# Altium PCB UD3c bootstrap output.PcbDoc
Units mm, origin at the board's own origin, x right, y up, seen from the top; angles counter-clockwise.
Board outline 41.73 x 30.78 mm, 2 copper layers (Top Layer, Bottom Layer); 25 components, 18 nets, 78 pads, 5 vias.
Unrouted connection lines stored in the file: 1.
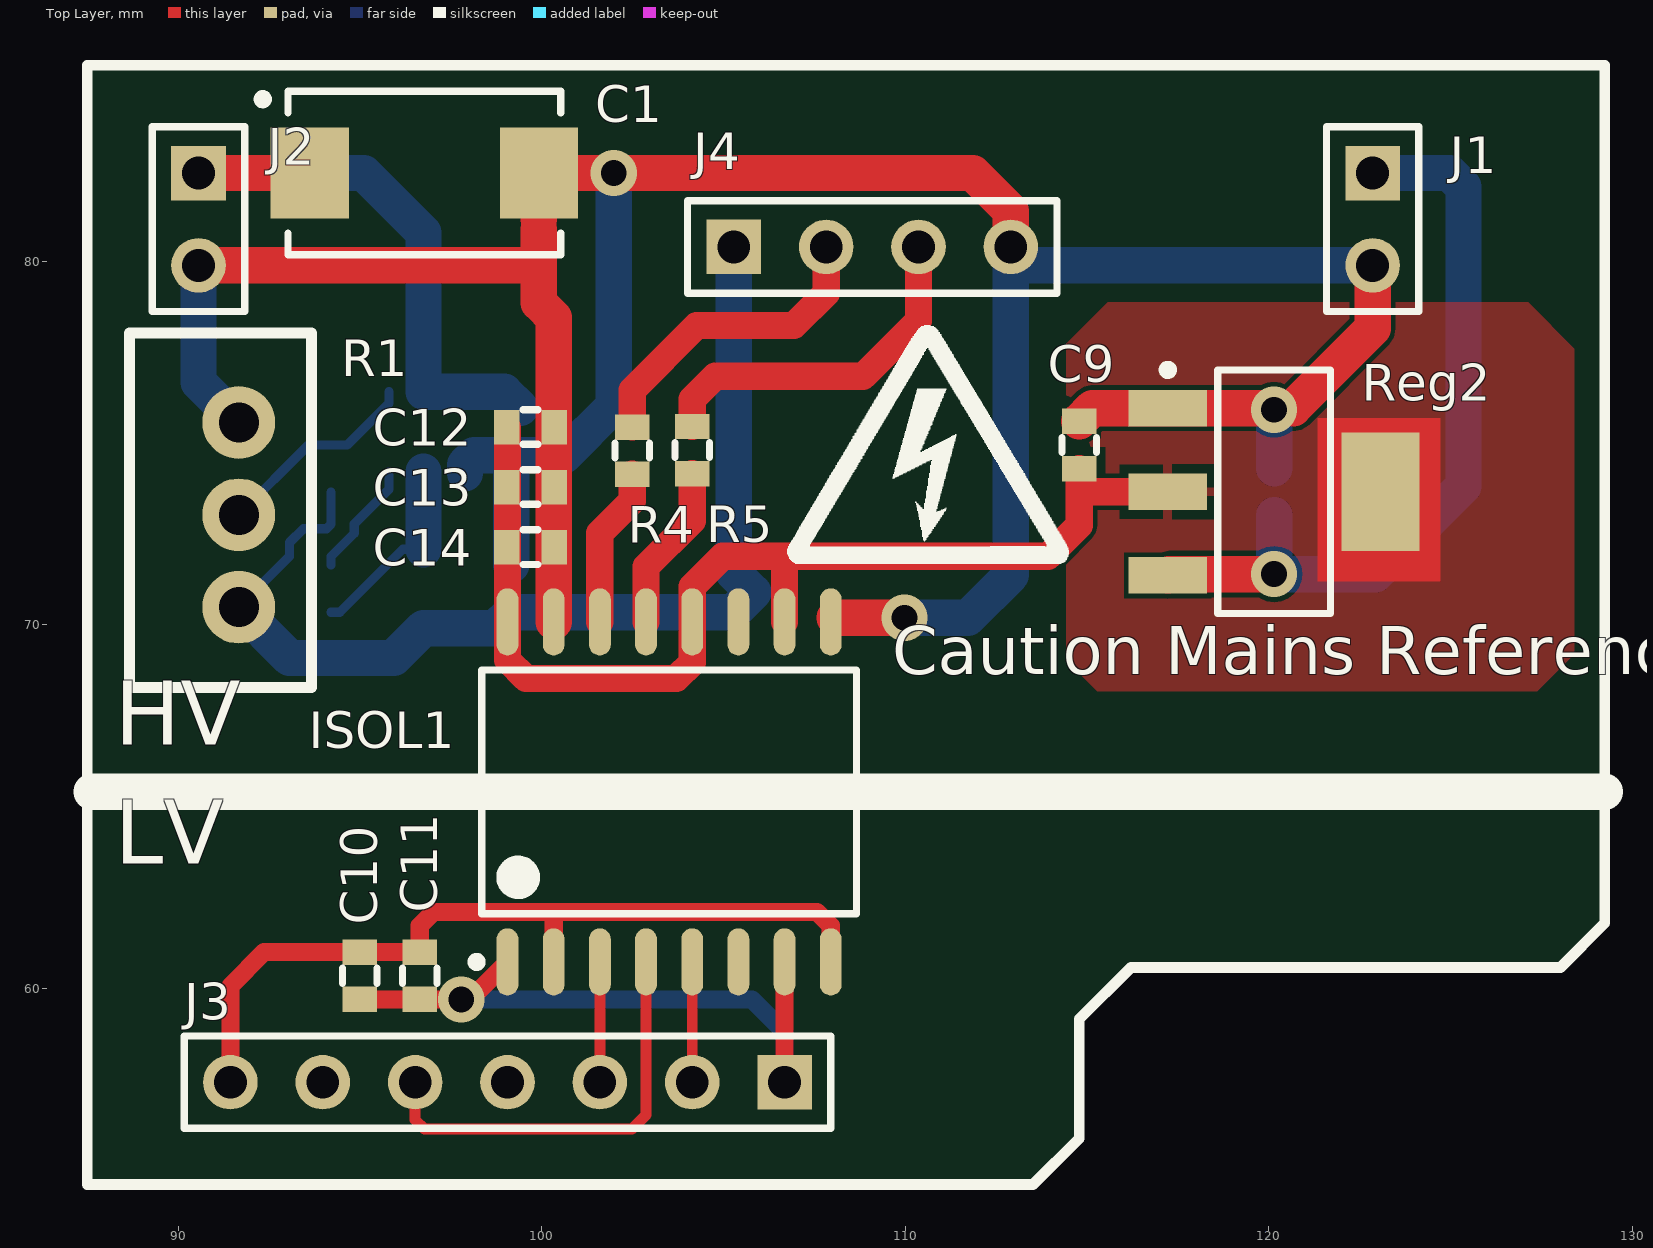
[diagram p0: Top Layer view]
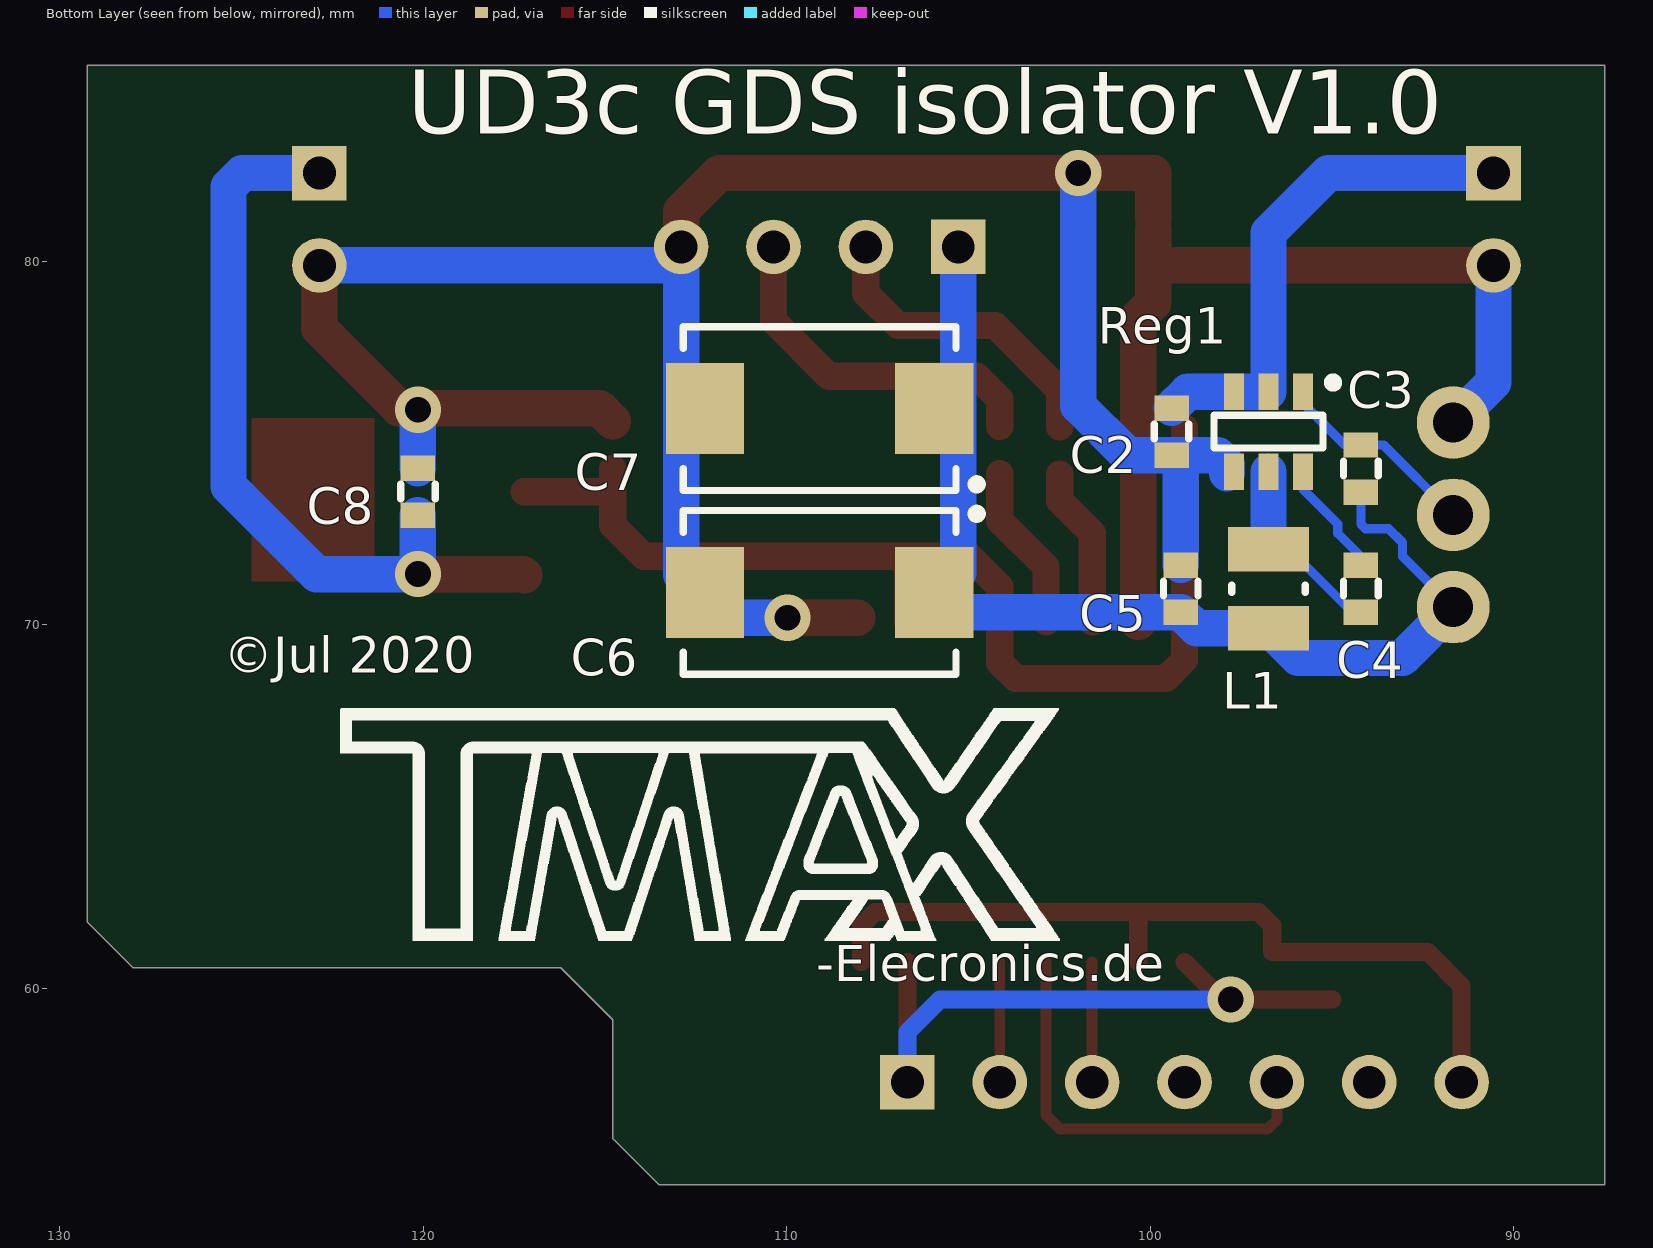
[diagram p1: Bottom Layer view, seen from below]
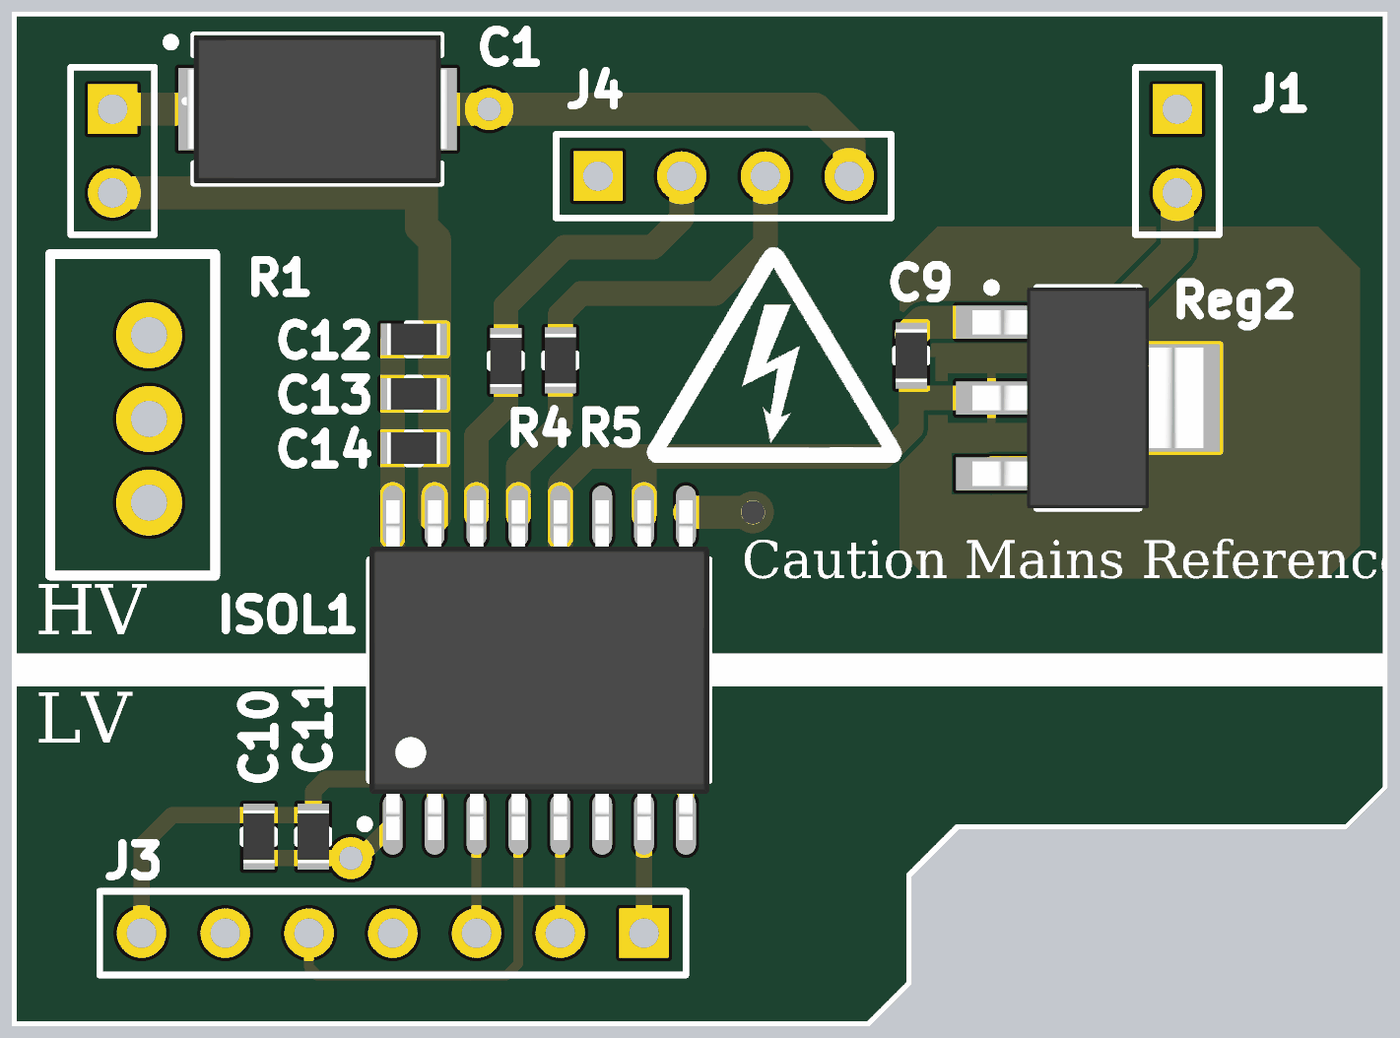
[diagram p2: 3D render of the assembled board from above, using the file's embedded part models]
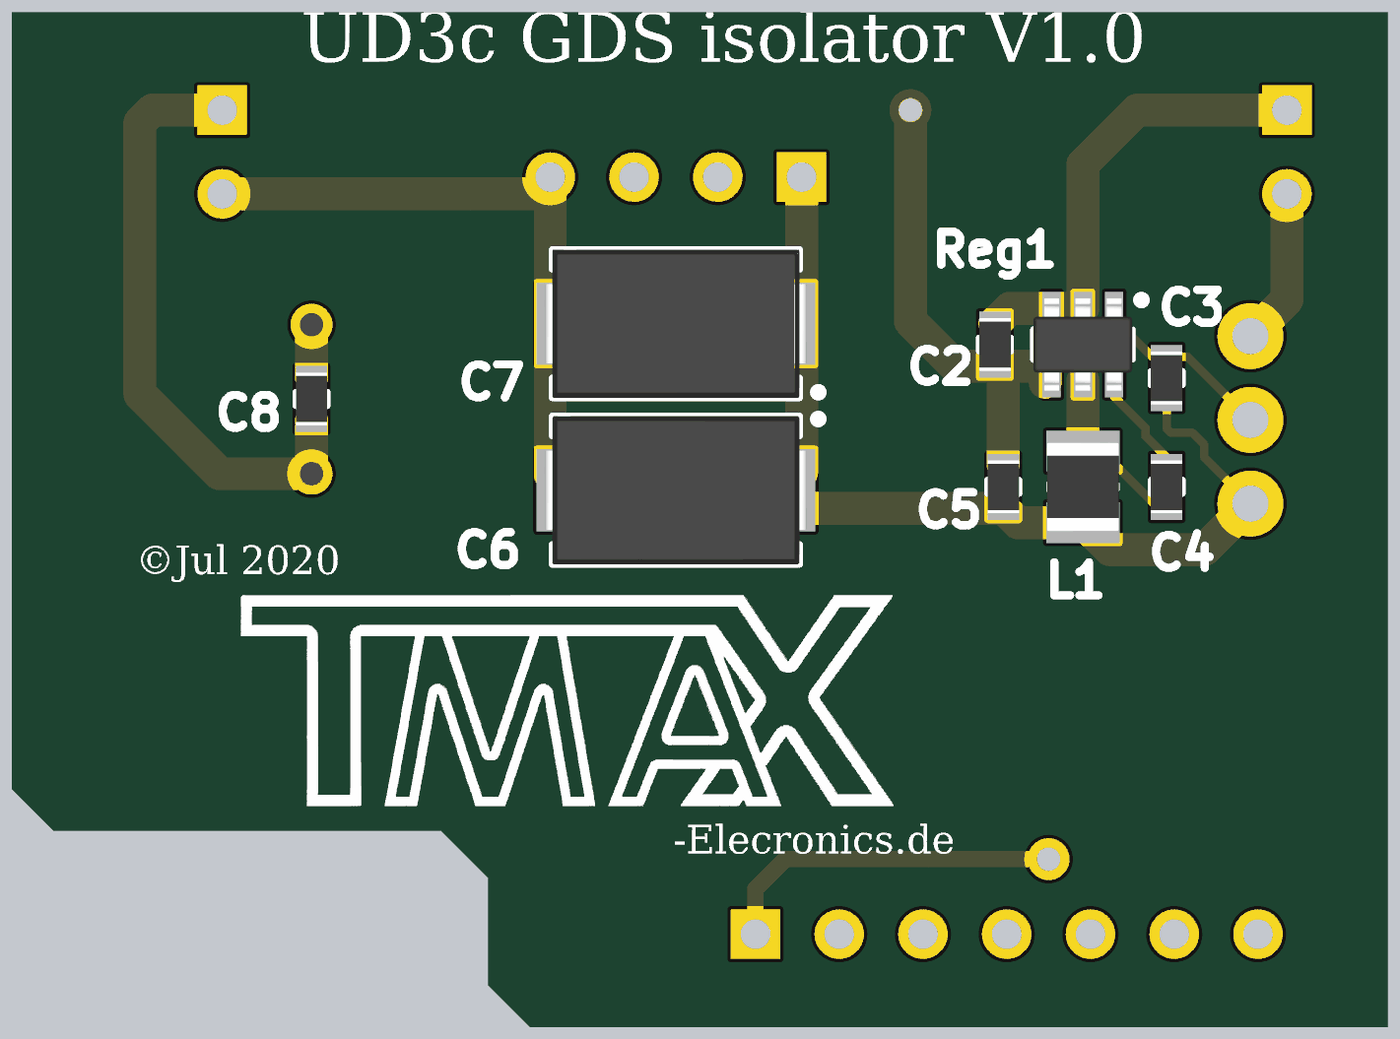
[diagram p3: 3D render of the assembled board from below, using the file's embedded part models]

## Layer stack, top to bottom
Top Solder: solder mask 0.0102, Solder Resist, Dk 3.5
Top Layer: signal copper 0.0356
Dielectric 1: dielectric 0.32, FR-4, Dk 4.8
Bottom Layer: signal copper 0.0356
Bottom Solder: solder mask 0.0102, Solder Resist, Dk 3.5

## Board outline
87.503,54.604 87.503,85.388 129.235,85.388 129.235,61.825 127.978,60.568 116.212,60.568 114.783,59.139 114.783,55.872 113.514,54.604

## Design rules (kind name [scope] priority, off if disabled: settings)
Clearance [All] p1: gap=0.127 ignorepadtopadclearanceinfootprint=FALSE except(0: Arc-Hole Track-Hole SMDPad-Hole THPad-Hole Via-Hole Fill-Hole Poly-Hole Region-Hole Text-Hole; 0.254: Arc-Text Track-Text SMDPad-Text THPad-Text Via-Text Fill-Text Poly-Text Region-Text Text-Text)
PolygonConnect [All] p1: connectstyle=Relief reliefconductorwidth=0.254 reliefentries=4 polygonreliefangle="90 Angle" airgapwidth=0.254
RoutingVias [All] p1: holewidth=0.711 width=1.27 viastyle="Through Hole" minholewidth=0.711 minwidth=1.27 maxholewidth=0.711 maxwidth=1.27
SolderMaskExpansion [All] p1: expansion=0.102
Width [All] p1: maxlimit=10 minlimit=0.127 preferedwidth=0.3 minimp=50.000000 maximp=50.000000 favimp=50.000000
30 further rules are at their usual default settings.

## Components (designator, comment, footprint, x,y, rotation, side; value= is the part's Value field where it differs from the comment)
C1 "22uF 25V" "2917 Tantalum" 96.774,82.423 r0 top
C2 "100nF" 0603 99.417,75.311 r90 bottom
C3 "100p" 0603 94.21,74.295 r270 bottom
C4 "100n" 0603 94.21,70.993 r270 bottom
C5 "100n" 0603 99.163,70.993 r90 bottom
C6 "22uF 25V" "2917 Tantalum" 109.093,70.893 r0 bottom
C7 "22uF 25V" "2917 Tantalum" 109.093,75.946 r0 bottom
C8 "100nF" 0603 120.142,73.66 r270 bottom
C9 "100nF" 0603 114.783,74.945 r270 top
C10 "10uF" 0603 94.996,60.349 r90 top
C11 "100n" 0603 96.647,60.349 r90 top
C12 "10uF" 0603 99.695,75.438 r180 top
C13 "1uF" 0603 99.695,73.787 r180 top
C14 "100nF" 0603 99.695,72.136 r180 top
ISOL1 "SI8423AB" "SOIC16 WIDE Isol" 103.505,65.405 r90 top
J1 "Gate Drive Power" HDR1X2 122.851,82.423 r270 top
J2 "Gate Drive Power" HDR1X2 90.563,82.423 r270 top
J3 "GD signal" HDR1X7 106.68,57.423 r180 top
J4 "Header 4" HDR1X4 105.283,80.391 r0 top (schematic designator P?)
L1 "10uH SW" 1008 96.75,70.993 r270 bottom
R1 "100k" "Trimmer vert" 91.67,73.025 r270 top
R4 "220" 0603 102.489,74.788 r270 top
R5 "220" 0603 104.14,74.803 r270 top
Reg1 "Buck regulator" TSOT26 96.75,75.311 r270 bottom
Reg2 "5V" SOT223 120.142,73.66 r0 top

## Footprints (in the part's own frame and the unit in brackets; to place one, negate y for a bottom-side part, rotate by r counter-clockwise, add the part's x,y. Pads: shape width x height; smd on the part's side, far side on the other; paste and mask are expansions set on the pad)
0603 [mm] "Chip Resistor, 2-Leads, Body 1.55x0.85mm, IPC Medium Density"
  rect 0.7x0.95 smd: 1(-0.65,0) 2(0.65,0)
  silkscreen extent -0.2,-0.48 0.2,0.48, body extent -0.8,-0.48 0.8,0.48, height 0.55
1008 [mm] "Chip Inductor, 2-Leads, Body 2,50x2,00mm, IPC Medium Density"
  rect 1.23x2.22 smd: 1(-1.085,0) 2(1.085,0)
  silkscreen extent -0.1,-1.01 0.1,1.01, body extent -1.35,-1.1 1.35,1.1, height 1.2
"2917 Tantalum" [mm] "Molded Capacitor, 2-Leads, Body 7.30x4.30mm, IPC Medium Density"
  rect 2.15x2.5 smd: 1(-3.15,0) 2(3.15,0)
  silkscreen extent -4.57,-2.25 3.75,2.25, body extent -3.97,-2.25 3.97,2.25, height 3.1
HDR1X2 [mm] "Connector; Header; 2 Position"
  rect 1.5x1.5 hole 0.9: 1(0,0)
  round 1.5 hole 0.9: 2(2.54,0)
  silkscreen extent -1.27,-1.27 3.81,1.27
HDR1X4 [mm] "Connector; Header; 4 Position"
  rect 1.5x1.5 hole 0.9: 1(0,0)
  round 1.5 hole 0.9: 2(2.54,0) 3(5.08,0) 4(7.62,0)
  silkscreen extent -1.27,-1.27 8.89,1.27
HDR1X7 [mm] "Connector; Header; 7 Position"
  rect 1.5x1.5 hole 0.9: 1(0,0)
  round 1.5 hole 0.9: 2(2.54,0) 3(5.08,0) 4(7.62,0) 5(10.16,0) 6(12.7,0) 7(15.24,0)
  silkscreen extent -1.27,-1.27 16.51,1.27
"SOIC16 WIDE Isol" [mm] "SOIC, 16-Leads, Body 10,30x7,50mm, Pitch 1,27mm, IPC Medium Density"
  oval 1.85x0.6 smd: 1(-4.675,4.445) 2(-4.675,3.175) 3(-4.675,1.905) 4(-4.675,0.635) 5(-4.675,-0.635) 6(-4.675,-1.905) 7(-4.675,-3.175) 8(-4.675,-4.445) 9(4.675,-4.445) 10(4.675,-3.175) 11(4.675,-1.905) 12(4.675,-0.635) 13(4.675,0.635) 14(4.675,1.905) 15(4.675,3.175) 16(4.675,4.445)
  silkscreen extent -4.8,-5.15 3.35,5.42, body extent -5.15,-5.15 5.15,5.15, height 2.65
SOT223 [mm] "SOT223, 4-Leads, Body 6.50x7.00mm (avg), Pitch 2.30mm, IPC Medium Density"
  rect 2.15x1 smd: 1(-2.925,2.3) 2(-2.925,0) 3(-2.925,-2.3)
  rect 2.15x3.25 smd: 2(2.925,0)
  silkscreen extent -3.05,-3.35 1.55,3.47, body extent -3.5,-3.35 3.5,3.35, height 1.8
"Trimmer vert" [mm]
  round 2 hole 1.1: 1(-2.54,0) 2(2.54,0) 3(0,0)
  silkscreen extent -5,-3 4.75,2, body extent -4.86,-3 4.74,2, height 11.6
TSOT26 [mm] "SOT23, 6-Leads, Body 2.90x2.80mm, Pitch 0.95mm, IPC Medium Density"
  rect 1x0.55 smd: 1(-1.099,0.95) 2(-1.099,0) 3(-1.099,-0.95) 4(1.099,-0.95) 5(1.099,0) 6(1.099,0.95)
  silkscreen extent -1.47,-1.5 0.45,1.9, body extent -1.4,-1.5 1.4,1.5, height 1

## Part data
C1 C6 C7: library part "Cap Polar", Supplier Part Number 1=478-9181-1-ND, Supplier 1=Digi-Key, Supplier 2=Digi-Key, Supplier 3=Digi-Key, Supplier 4=Digi-Key, Supplier 5=Digi-Key, Supplier 6=Digi-Key, Supplier Part Number 2=478-9173-1-ND, Supplier Part Number 3=493-11037-ND, Supplier Part Number 4=PCE3462CT-ND, Supplier Part Number 5=399-18864-1-ND, Supplier Part Number 6=399-10512-1-ND
C2 C8 C9 C12 C13 C14: library part Cap, Supplier Part Number 1=1276-2044-1-ND, Supplier Part Number 10=1276-CL10B104KB8NNNLCT-ND, Supplier Part Number 11=399-1085-1-ND, Supplier Part Number 12=1276-1021-1-ND, Supplier Part Number 13=587-2985-1-ND, Supplier 1=Digi-Key, Supplier 2=Digi-Key, Supplier 3=Digi-Key, Supplier 4=Digi-Key, Supplier 5=Digi-Key, Supplier 6=Digi-Key, Supplier 7=Digi-Key, Supplier 8=Digi-Key, Supplier 9=Digi-Key, Supplier 10=Digi-Key, Supplier 11=Digi-Key, Supplier 12=Digi-Key, Supplier 13=Digi-Key, Supplier Part Number 2=1276-1018-1-ND, Supplier Part Number 3=1276-1182-1-ND, Supplier Part Number 4=1276-1009-1-ND, Supplier Part Number 5=1276-1098-1-ND, Supplier Part Number 6=1276-1119-1-ND, Supplier Part Number 7=490-12737-1-ND, Supplier Part Number 8=1276-1183-1-ND, Supplier Part Number 9=587-1249-1-ND
C3 C4 C5 C10 C11: library part Cap, Supplier Part Number 1=1276-2044-1-ND, Supplier Part Number 10=1276-CL10B104KB8NNNLCT-ND, Supplier Part Number 11=399-1085-1-ND, Supplier Part Number 12=1276-1021-1-ND, Supplier Part Number 13=587-2985-1-ND, Supplier Part Number 14=490-14603-1-ND, Supplier Part Number 15=311-3700-1-ND, Supplier Part Number 16=311-1042-1-ND, Supplier Part Number 17=311-1415-1-ND, Supplier Part Number 18=1276-1907-1-ND, Supplier Part Number 19=587-4321-1-ND, Supplier 1=Digi-Key, Supplier 2=Digi-Key, Supplier 3=Digi-Key, Supplier 4=Digi-Key, Supplier 5=Digi-Key, Supplier 6=Digi-Key, Supplier 7=Digi-Key, Supplier 8=Digi-Key, Supplier 9=Digi-Key, Supplier 10=Digi-Key, Supplier 11=Digi-Key, Supplier 12=Digi-Key, Supplier 13=Digi-Key, Supplier 14=Digi-Key, Supplier 15=Digi-Key, Supplier 16=Digi-Key, Supplier 17=Digi-Key, Supplier 18=Digi-Key, Supplier 19=Digi-Key, Supplier 20=Digi-Key, Supplier 21=Digi-Key, Supplier 22=Digi-Key, Supplier Part Number 2=1276-1018-1-ND, Supplier Part Number 3=1276-1182-1-ND, Supplier Part Number 4=1276-1009-1-ND, Supplier Part Number 5=1276-1098-1-ND, Supplier Part Number 6=1276-1119-1-ND, Supplier Part Number 7=490-12737-1-ND, Supplier Part Number 8=1276-1183-1-ND, Supplier Part Number 9=587-1249-1-ND, Supplier Part Number 20=1276-6767-1-ND, Supplier Part Number 21=1276-7060-1-ND, Supplier Part Number 22=311-1084-1-ND
ISOL1: "Three (2/1) channel isolator", Supplier Part Number 1=SI8631AB-B-IS1-ND, Supplier 1=Digi-Key
J1 J2: library part "Header 2", "Header, 2-Pin", LatestRevisionDate=17-Jul-2002, LatestRevisionNote="Re-released for DXP Platform.", Publisher="Altium Limited"
J3: library part "Header 7", "Header, 7-Pin", LatestRevisionDate=17-Jul-2002, LatestRevisionNote="Re-released for DXP Platform.", Publisher="Altium Limited"
J4: "Header, 4-Pin", LatestRevisionDate=17-Jul-2002, LatestRevisionNote="Re-released for DXP Platform.", Publisher="Altium Limited"
L1: library part Inductor, Supplier Part Number 1=541-1250-1-ND, Supplier Part Number 10=SRP1770TA-5R6MCT-ND, Supplier Part Number 11=SRN6028-100MCT-ND, Supplier 1=Digi-Key, Supplier 2=Digi-Key, Supplier 3=Digi-Key, Supplier 4=Digi-Key, Supplier 5=Digi-Key, Supplier 6=Digi-Key, Supplier 7=Digi-Key, Supplier 8=Digi-Key, Supplier 9=Digi-Key, Supplier 10=Digi-Key, Supplier 11=Digi-Key, Supplier Part Number 2=541-1253-1-ND, Supplier Part Number 3=SRN6028-3R9MCT-ND, Supplier Part Number 4=SRN6028-4R7MCT-ND, Supplier Part Number 5=490-10563-1-ND, Supplier Part Number 6=1276-6932-1-ND, Supplier Part Number 7=587-2042-1-ND, Supplier Part Number 8=535-12790-1-ND, Supplier Part Number 9=SRP1265A-1R0MCT-ND
R1: library part Trimmer
R4 R5: library part Resistor, Supplier Part Number 1=RHM10DCT-ND, Supplier Part Number 10=311-200JRCT-ND, Supplier Part Number 11=311-300JRCT-ND, Supplier Part Number 12=YAG3356CT-ND, Supplier Part Number 13=311-220GRCT-ND, Supplier Part Number 14=311-220KGRCT-ND, Supplier Part Number 15=311-1.0KGRCT-ND, Supplier Part Number 16=311-200KHRCT-ND, Supplier Part Number 17=A102451-ND, Supplier Part Number 18=311-2.00KHRCT-ND, Supplier Part Number 19=311-10KGRCT-ND, Supplier 1=Digi-Key, Supplier 2=Digi-Key, Supplier 3=Digi-Key, Supplier 4=Digi-Key, Supplier 5=Digi-Key, Supplier 6=Digi-Key, Supplier 7=Digi-Key, Supplier 8=Digi-Key, Supplier 9=Digi-Key, Supplier 10=Digi-Key, Supplier 11=Digi-Key, Supplier 12=Digi-Key, Supplier 13=Digi-Key, Supplier 14=Digi-Key, Supplier 15=Digi-Key, Supplier 16=Digi-Key, Supplier 17=Digi-Key, Supplier 18=Digi-Key, Supplier 19=Digi-Key, Supplier 20=Digi-Key, Supplier 21=Digi-Key, Supplier 22=Digi-Key, Supplier 23=Digi-Key, Supplier 24=Digi-Key, Supplier 25=Digi-Key, Supplier 26=Digi-Key, Supplier 27=Digi-Key, Supplier 28=Digi-Key, Supplier 29=Digi-Key, Supplier 30=Digi-Key, Supplier 31=Digi-Key, Supplier 32=Digi-Key, Supplier 33=Digi-Key, Supplier 34=Digi-Key, Supplier 35=Digi-Key, Supplier 36=Digi-Key, Supplier 37=Digi-Key, Supplier 38=Digi-Key, Supplier 39=Digi-Key, Supplier 40=Digi-Key, Supplier 41=Digi-Key, Supplier 42=Arrow, Supplier Part Number 2=696-1834-1-ND, Supplier Part Number 3=RMCF0603JT3K90CT-ND, Supplier Part Number 4=RHM1.0KDCT-ND, Supplier Part Number 5=RHM100DCT-ND, Supplier Part Number 6=RMCF0603FT54K9CT-ND, Supplier Part Number 7=RMCF0603FT40K2CT-ND, Supplier Part Number 8=P200LCT-ND, Supplier Part Number 9=311-1.0KJRCT-ND, Supplier Part Number 20=311-1.00LRCT-ND, Supplier Part Number 21=311-220JRCT-ND, Supplier Part Number 22=311-2.2KJRCT-ND, Supplier Part Number 23=311-4.7KJRCT-ND, Supplier Part Number 24=311-10.0KLRCT-ND, Supplier Part Number 25=311-12KJRCT-ND, Supplier Part Number 26=YAG3226CT-ND, Supplier Part Number 27=311-75KJRCT-ND, Supplier Part Number 28=311-200KJRCT-ND, Supplier Part Number 29=311-499KLRCT-ND, Supplier Part Number 30=YAG6087CT-ND, Supplier Part Number 31=696-1677-1-ND, Supplier Part Number 32=541-3127-6-ND, Supplier Part Number 33=311-47.0HRCT-ND, Supplier Part Number 34=311-470HRCT-ND, Supplier Part Number 35=311-470KGRCT-ND, Supplier Part Number 36=311-100KGRCT-ND, Supplier Part Number 37=311-5.23KHRCT-ND, Supplier Part Number 38=311-52.3KHRCT-ND, Supplier Part Number 39=311-22KGRCT-ND, Supplier Part Number 40=311-15.8KHRCT-ND, Supplier Part Number 41=311-7.15KHRCT-ND, Supplier Part Number 42=RC0603FR-072K2L
Reg1: library part AP6320, Supplier Part Number 1=AP63203WU-7DICT-ND, Supplier 1=Digi-Key, Supplier 2=Digi-Key, Supplier 3=Digi-Key, Supplier Part Number 2=AP63200WU-7DICT-ND, Supplier Part Number 3=AP63201WU-7DICT-ND
Reg2: library part VReg

## Via types
v1: diameter 1.27, hole 0.711, Top Layer to Bottom Layer, 3 vias
v2: diameter 1.27, hole 0.711, Top Layer to Bottom Layer, tented bottom, 1 vias
v3: diameter 1.27, hole 0.711, Top Layer to Bottom Layer, tented top, 1 vias

## Nets (pads, with @x,y where several pads share a name; then routed paths per layer and width w, separated by ;. In a path a pad name is that pad's centre, name@x,y a point inside that pad or via, vN(x,y) a via of type N, cw(c..) or ccw(c..) an arc to the next point about the centre after c; other vN are vias at no path point)
+5V: C9.2 C12.2 C13.2 C14.2 ISOL1.10 ISOL1.12 ISOL1.16 Reg2.2 | length 31.1
  Top Layer w0.75: C12.2@99.06,75.423 ISOL1.16 99.06,69.033 99.568,68.525 103.704,68.525 104.14,68.961 ISOL1.12 104.14,71.048 104.974,71.882 106.68,71.882 ; ISOL1.10 106.68,71.882 ; C9.2 114.783,73.66 ; Reg2.2@117.217,73.66 114.783,73.66 ; 106.68,71.882 113.927,71.882 114.783,72.738 114.783,73.66
+5V_CTRL: C10.1 C11.1 ISOL1.1 ISOL1.7 J3.1 | length 18.4
  Top Layer w0.5: C10.1 C11.1 v1(97.79,59.699) 98.029,59.699 ISOL1.1 ; J3.1 ISOL1.7
  Bottom Layer w0.5: v1(97.79,59.699) 105.782,59.699 106.68,58.801 J3.1
+24V: C1.1 C2.2 C8.2 J1.1 J2.1 Reg1.2 Reg1.3 Reg2.3 | length 38.8
  Top Layer w1: J2.1 C1.1 ; Reg2.3 117.25,71.393 v1(120.142,71.393)
  Bottom Layer w1: J2.1 95.107,82.423 96.75,80.78 Reg1.2 Reg1.3 98.968,76.41 C2.2 ; C8.2 v1(120.142,71.393) 122.929,71.393 125.349,73.813 125.349,82.042 124.968,82.423 J1.1
GND: C10.2 C11.2 ISOL1.2 ISOL1.8 J3.7 | length 22.9
  Top Layer w0.5: J3.7 91.44,60.071 92.368,60.999 C10.2 C11.2 96.647,61.722 97.028,62.103 100.33,62.103 ; ISOL1.2 100.33,62.103 ; ISOL1.8 107.95,61.722 107.569,62.103 100.33,62.103
HV_GND: C1.2 C2.1 C5.2 C6.2 C7.2 C8.1 C9.1 C12.1 C13.1 C14.1 ISOL1.9 ISOL1.15 J1.2 J2.2 J4.4 R1.1 Reg1.4 Reg2.1 | length 91.7
  Top Layer w1: J2.2 99.924,79.883 ; 99.924,80.874 99.924,79.883 ; 99.924,81.152 C1.2 v2(101.981,82.423) 111.854,82.423 112.903,81.374 J4.4 ; ISOL1.15 100.33,78.45 99.924,78.856 99.924,79.883 ; ISOL1.9@108.063,70.193 v3(109.982,70.193) ; C9.1 115.148,75.96 Reg2.1 v1@120.142,75.96 ; v1@120.664,75.96 122.851,78.147 J1.2
  Bottom Layer w1: J2.2 90.563,76.672 R1.1 ; Reg1.4@97.893,74.168 97.893,74.405 98.149,74.661 C2.1 ; C5.2 99.163,74.407 C2.1 ; v2(101.981,82.423) 101.981,76.025 100.617,74.661 C2.1 ; v3(109.982,70.193) 111.722,70.193 112.903,71.374 J4.4 113.411,79.883 J1.2 ; C8.1 v1(120.142,75.913)
NetC3_1: C3.1 R1.3 Reg1.1 | length 5.7
  Bottom Layer w0.254: R1.3 93.59,74.945 C3.1 94.65,74.945 95.8,76.095 Reg1.1
NetC4_1: C4.1 Reg1.6 | length 3.2
  Bottom Layer w0.254: C4.1 94.21,71.882 94.845,72.517 94.845,72.771 95.8,73.726 Reg1.6
NetC4_2: C4.2 L1.1 Reg1.5 | length 5.4
  Bottom Layer w0.254: C4.2 94.449,70.343 96.184,72.078 L1.1
  Bottom Layer w1: L1.1 Reg1.5
NetISOL1_3: ISOL1.3 J3.3 | length 3.3
  Top Layer w0.3: J3.3 ISOL1.3
NetISOL1_4: ISOL1.4 J3.5 | length 11.9
  Top Layer w0.3: J3.5 96.52,56.388 96.774,56.134 102.489,56.134 102.87,56.515 ISOL1.4
NetISOL1_5: ISOL1.5 J3.2 | length 3.3
  Top Layer w0.3: J3.2 ISOL1.5
NetISOL1_13: ISOL1.13 R5.2 | length 4.6
  Top Layer w0.75: ISOL1.13 102.87,71.595 104.14,72.865 R5.2
NetISOL1_14: ISOL1.14 R4.2 | length 4.4
  Top Layer w0.75: ISOL1.14 101.6,72.517 102.489,73.406 R4.2
NetJ3_4: J3.4
NetJ3_6: J3.6
NetJ4_2: J4.2 R4.1 | length 8.7
  Top Layer w0.75: R4.1 102.489,76.454 104.267,78.232 106.934,78.232 107.823,79.121 J4.2
NetJ4_3: J4.3 R5.1 | length 9.9
  Top Layer w0.75: R5.1 104.14,76.2 104.775,76.835 108.839,76.835 110.363,78.359 J4.3
VDrive: C3.2 C5.1 C6.1 C7.1 J4.1 L1.2 R1.2 | length 29.8
  Bottom Layer w0.254: R1.2 93.067,71.882 93.067,72.263 93.448,72.644 94.083,72.644 94.21,72.771 C3.2
  Bottom Layer w1: R1.2 93.067,69.088 95.93,69.088 L1.2 98.728,69.908 C5.1 105.266,70.343 105.816,70.893 105.283,71.426 J4.1
pads on no net: ISOL1.6 ISOL1.11

## Polygon pours and split planes (outlines as drawn)
+5V on Top Layer (solid, pour order 0): 127.127,78.867 128.397,77.597 128.397,69.195 127.381,68.179 115.281,68.179 114.427,69.033 114.427,77.724 115.57,78.867

## Other copper
Top Layer:
  rectangle net +5V: 121.331,71.194 124.714,75.692

## Silkscreen, mask and mechanical layers (free items; w line width, h text height)
Top Overlay:
  drawing of 12 lines, arcs and shapes, not listed
  text "Caution Mains Reference" at 109.642,68.199 h2.25
  text "HV" at 88.265,66.128 h3
  text "LV" at 88.265,62.846 h3
Bottom Overlay:
  drawing of 2 lines, arcs and shapes, not listed
  text "UD3c GDS isolator V1.0" at 120.422,82.931 h3
  text "©Jul 2020" at 125.477,68.349 h1.7
  text "-Elecronics.de" at 109.183,59.871 h1.7
Mechanical 8:
  the board outline again, w0.3